# Altium PCB tomg.PcbDoc (part 2 of 2)
Units mm, origin at the board's own origin, x right, y up, seen from the top; angles counter-clockwise.
Board outline 105.3 x 86.65 mm, 2 copper layers (Top Layer, Bottom Layer); 102 components, 0 nets, 379 pads, 0 vias.
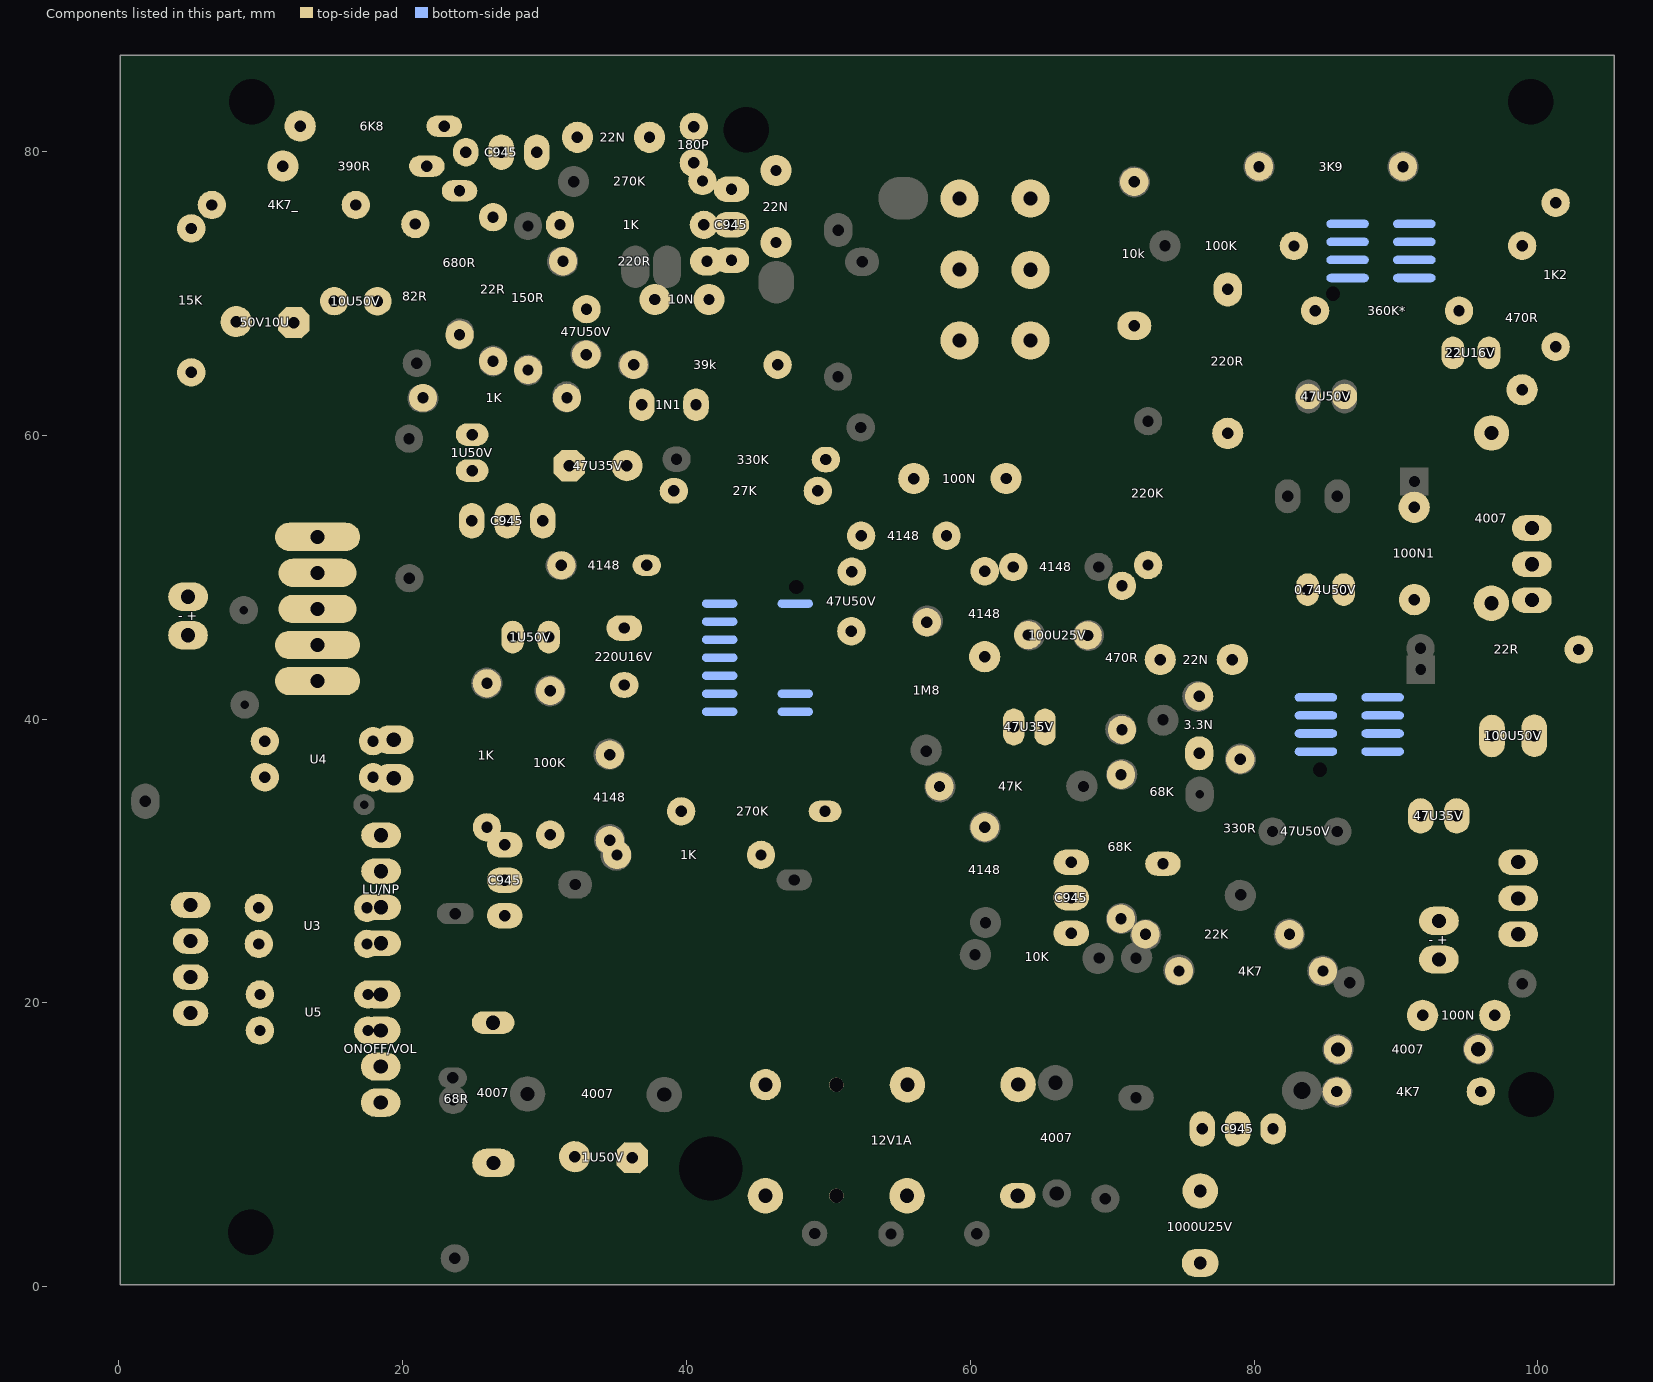
[diagram p2: the components of this part, seen from the top]

## Nets (pads, with @x,y where several pads share a name; then routed paths per layer and width w, separated by ;. In a path a pad name is that pad's centre, name@x,y a point inside that pad or via, vN(x,y) a via of type N, cw(c..) or ccw(c..) an arc to the next point about the centre after c; other vN are vias at no path point) (continued)
copper on no net: | length 5059.3
  Bottom Layer w0.25: 0,1.872 0,0 1.67,0 ; 0,85.929 0,86.846 0.932,86.846 ; 39.643,79.334 39.643,77.676 ; 40.003,78.538 40.003,77.542 39.777,77.542 39.643,77.676 ; 51.749,72.619 50.878,72.619 50.623,72.364 50.623,71.284 51.998,71.284 52.055,71.34 52.055,71.392 ; 104.082,86.846 105.479,86.846 105.479,85.554 ; 104.532,0 105.479,0 105.479,0.954 ; 39.643,77.676 40.782,76.537 ; 39.643,77.676 39.936,77.969 39.936,78.597 39.811,78.722 ; 39.643,77.676 39.643,78.555 39.811,78.722 ; 39.643,77.676 39.702,77.676 39.995,77.969 39.995,78.538 39.811,78.722 ; 40.782,76.537 43.076,76.537 40.782,76.537 ; 40.782,76.537 41.041,76.797 42.431,76.797 ; 41.309,76.797 42.431,76.797 ; 41.309,76.797 41.527,76.579 42.214,76.579 42.431,76.797 ; 41.309,76.797 42.18,76.797 42.431,76.797
  Bottom Layer w0.3: 57.241,48.848 57.76,48.329 ; 58.263,47.842 58.263,48.086 ; 82.756,13.542 80.356,13.542 79.966,13.152 80.21,13.396 82.983,13.396
  Bottom Layer w0.5: 12.582,82.478 14.002,83.897 15.056,83.897 13.564,83.897 11.804,82.137 11.804,81.367 12.38,80.791 12.882,80.791 13.053,80.961 15.469,83.378 15.51,83.378 ; 23.075,82.222 24.607,82.222 25.126,81.703 25.126,79.869 25.009,79.987 25.009,81.619 24.641,81.987 23.82,81.987 24.273,81.535 24.54,81.535 24.825,81.251 24.825,81.167 24.808,81.15 24.808,81.134 ; 25.019,8.516 25.436,8.099 ; 25.103,41.882 25.74,41.245 30.476,41.245 ; 25.63,19.208 25.241,18.819 25.647,18.819 ; 26.973,8.061 27.06,8.061 ; 26.977,45.564 25.347,43.934 25.347,43.171 25.111,42.936 25.111,44.136 27.488,46.512 27.488,46.529 ; 27.169,13.313 27.169,13.631 27.973,14.434 ; 27.252,13.166 27.301,13.166 28.161,14.026 28.161,14.577 28.096,14.513 28.096,14.334 ; 28.501,12.015 29.089,12.015 29.097,12.007 ; 28.502,25.854 28.544,25.896 ; 29.446,34.108 29.446,31.195 29.815,30.827 30.853,30.827 31.64,31.614 31.64,33.338 ; 29.557,19.229 25.051,19.229 24.909,19.086 24.909,18.429 25.298,18.04 29.231,18.04 30.156,18.965 ; 30.658,10.506 30.658,9.071 31.307,8.422 32.418,8.422 31.599,9.241 31.08,9.241 30.958,9.12 ; 32.937,38.525 35.054,38.525 35.378,38.2 35.378,37.657 ; 32.994,40.901 33.091,40.803 36.562,40.803 ; 32.996,38.495 32.803,38.495 32.042,37.734 32.042,37.491 32.435,37.097 32.46,37.097 33.256,37.893 ; 33.691,41.42 36.886,41.42 37.049,41.257 33.286,41.257 33.999,41.257 34.405,41.663 35.378,41.663 ; 33.963,42.523 34.51,43.07 35.629,43.07 36.201,43.07 37.101,42.17 37.101,41.259 ; 34.852,62.9 36.833,62.9 ; 35.576,29.708 35.532,29.664 35.532,29.258 34.547,29.258 34.077,29.727 33.709,29.727 34.458,28.978 35.817,28.978 35.906,29.067 35.906,30.528 ; 36.179,54.175 36.179,55.121 37.805,56.747 38.84,56.747 ; 37.125,52.149 37.125,52.384 39.983,55.242 39.983,56.08 ; 38.624,58.696 38.624,58.823 39.195,59.395 44.199,59.395 44.364,59.23 43.742,59.23 43.628,59.115 39.411,59.115 ; 38.764,56.747 40.027,56.747 40.053,56.721 40.053,55.324 39.348,54.619 ; 39.322,54.912 39.322,55.559 39.665,55.902 ; 39.38,57.775 41.126,57.775 41.196,57.845 ; 39.811,78.974 39.811,77.935 40.012,77.735 ; 40.355,79.945 41,79.945 42.691,78.254 43.051,78.254 ; 41.215,58.226 41.253,58.264 ; 44.621,30.079 46.534,28.165 47.095,28.165 ; 48.713,71.269 48.713,70.606 49.819,69.5 50.273,69.5 ; 49.942,74.912 49.942,75.759 50.703,76.521 ; 50.064,74.801 50.064,75.655 50.771,76.361 ; 50.359,73.794 49.935,74.218 49.935,74.807 49.935,76.374 50.703,77.141 51.133,77.141 ; 52.055,71.392 55.5,71.392 56.237,72.129 56.237,72.528 ; 58.641,66.252 58.877,66.488 ; 61.03,47.218 61.398,47.218 64.684,43.932 64.728,43.932 ; 63.86,46.981 64.044,46.981 64.036,46.972 64.036,46.876 63.755,47.156 63.755,46.99 65.069,45.676 65.148,45.676 65.148,46.394 ; 65.49,41.899 65.49,46.561 ; 67.103,35.472 67.103,33.728 68.282,32.548 67.595,33.236 67.595,34.268 67.423,34.44 ; 67.128,35.429 67.128,35.988 67.251,36.111 68.08,36.111 68.307,35.884 ; 67.505,46.403 67.505,46.42 67.803,46.718 68.82,46.718 68.925,46.823 68.925,46.42 68.942,46.403 68.942,42.775 68.995,42.723 68.995,46.298 68.697,46.596 68.697,43.143 69.135,42.705 69.135,41.041 67.277,42.898 67.277,46.841 67.575,47.139 68.925,47.139 69.573,46.49 69.573,41.724 ; 68.545,33.449 70.006,31.988 70.323,31.988 ; 68.577,33.052 68.577,35.288 68.626,35.337 68.626,33.74 68.565,33.679 68.565,34.882 68.688,34.76 ; 68.698,32.864 68.745,32.912 68.745,35.233 ; 69.31,41.987 69.31,46.333 ; 73.087,40.042 72.64,40.489 72.64,41.435 73.271,42.066 75.452,42.066 ; 76.747,60.434 79.044,62.732 79.265,62.732 ; 76.986,59.574 76.986,59.673 76.654,60.004 77.637,60.987 77.637,61.208 ; 78.024,60.815 76.611,60.815 76.317,60.52 76.317,59.869 76.857,59.329 78.749,59.329 79.83,60.41 79.83,60.778 79.265,61.343 ; 78.27,61.27 77.127,61.27 76.353,60.496 76.353,60.643 77.047,61.337 78.485,61.337 ; 78.319,12.856 78.344,12.856 78.896,13.409 ; 78.376,12.761 78.249,12.761 78.503,12.507 78.503,11.11 78.046,11.567 78.046,13.142 78.559,13.655 81.455,13.655 81.907,14.107 ; 79.189,11.516 79.468,11.795 79.468,12.634 79.849,13.015 79.849,13.446 79.986,13.31 83.374,13.31 ; 79.246,10.202 79.246,12.082 ; 79.468,12.1 79.468,12.354 80.332,13.218 82.805,13.218 82.983,13.396 ; 81.734,23.679 83.884,25.829 84.547,25.829 81.709,22.991 81.709,22.954 83.945,25.19 83.945,26.099 ; 82.238,60.963 83.368,60.963 84.449,62.044 84.449,62.572 84.449,62.486 83.405,61.442 ; 82.485,15.064 82.554,14.995 83.279,14.995 ; 83.253,14.891 83.236,14.874 82.131,14.874 80.991,13.735 80.646,13.735 82.303,15.392 83.563,15.392 84.616,14.339 84.616,13.718 ; 83.392,63.333 81.771,63.333 81.23,62.793 81.144,62.793 82.164,63.813 83.859,63.813 ; 86.525,63.702 88.355,63.702 89.264,62.793 88.675,63.383 87.127,63.383 87.188,63.321 ; 88.972,28.27 89.28,28.578 ; 89.211,7.33 89.646,7.33 ; 92.352,22.394 93.018,23.06 ; 93.024,25.778 93.024,25.896 ; 97.442,28.131 100.609,28.131 101.844,26.897 101.844,26.448 ; 97.757,29.918 99.317,29.918 99.505,30.106 ; 98.606,22.762 98.606,21.726 98.606,24.838 ; 98.606,27.366 98.613,27.372 ; 98.889,50.762 99.114,50.988 ; 99.097,35.276 99.097,35.476 ; 100.486,43.046 100.486,48.223 99.928,48.782 99.928,49.126 100.382,49.126 100.787,48.721 100.787,42.573 ; 101.807,54.464 99.104,54.464 99.018,54.378 98.638,54.378 98.945,54.378 98.994,54.427 98.994,54.071 98.404,53.481 98.404,54.415 98.92,54.931 102.925,54.931 ; 26.952,12.891 26.952,13.822 27.998,14.869 31.794,14.869 32.637,14.026 28.501,14.026 27.366,12.891 26.952,12.891
  Bottom Layer w0.6: 18.85,28.902 19.036,28.902 ; 30.294,45.781 31.709,44.366 37.59,44.366 39.668,46.444 39.668,48.514 46.507,55.354 ; 36.702,40.446 36.773,40.518 42.337,40.518 ; 41.788,43.058 41.788,44.355 ; 42.059,48.217 42.059,48.965 43.415,50.321 49.308,56.214 ; 42.337,41.788 43.879,41.788 44.332,41.335 44.332,32.083 43.48,31.231 43.48,28.667 44.95,27.197 52.512,27.197 57.697,32.382 61.014,32.382 ; 42.337,45.598 45.466,45.598 45.466,31.327 45.502,31.291 ; 43.181,46.861 43.836,46.861 44.358,47.384 44.358,49.195 45.566,50.402 49.467,54.304 51.007,54.304 51.482,54.779 52.657,54.779 ; 45.466,45.468 45.466,48.649 47.21,50.394 51.642,50.394 ; 46.7,40.513 46.7,32.101 48.597,30.204 51.184,30.204 53.857,32.877 53.857,34.254 ; 47.662,41.788 49.224,41.788 50.01,41.002 50.01,39.778 47.875,37.643 47.875,32.761 49.157,31.479 50.557,31.479 52.678,33.599 52.678,42.572 54.502,44.396 61.014,44.396 ; 47.662,48.138 52.71,48.138 ; 48.382,62.829 53.407,62.829 53.933,62.303 63.232,62.303 70.401,69.472 ; 51.642,50.619 52.302,51.279 52.302,52.915 ; 52.132,48.138 53.492,48.138 55.711,50.357 58.29,50.357 59.943,48.704 63.482,48.704 ; 52.457,54.779 53.713,54.779 55.576,52.915 58.322,52.915 ; 53.857,33.929 53.857,37.944 56.32,40.406 59.145,40.406 60.37,39.182 60.37,36.309 59.287,35.226 57.865,35.226 57.861,35.23 ; 63.057,48.704 64.415,48.704 65.457,49.746 65.457,51.858 63.06,54.255 61.89,54.255 60.634,55.511 60.634,58.194 61.519,59.078 64.078,59.078 68.729,63.729 ; 65.207,68.929 67.307,68.929 69.276,70.897 73.333,70.897 74.757,69.473 74.757,66.054 73.057,64.354 70.879,64.354 68.392,61.867 ; 68.654,63.729 70.681,65.756 72.449,65.756 73.648,66.955 73.648,68.439 72.62,69.466 70.401,69.466 ; 77.79,60.137 76.163,58.51 69.44,58.51 68.775,59.175 68.775,60.725 70.872,62.822 73.855,62.822 75.914,64.881 75.914,71.767 77.488,73.342 82.804,73.342 ; 78.464,44.193 81.027,41.629 81.027,38.159 84.017,35.169 84.017,30.962 84.688,30.291 86.741,30.291 87.68,31.23 87.68,34.717 86.857,35.539 86.857,37.454 ; 78.819,35.379 81.923,35.379 82.907,34.395 82.907,32.704 ; 82.907,33.554 82.907,30.343 84.058,29.193 87.448,29.193 88.832,30.578 88.832,37.729 ; 84.023,37.661 85.743,37.661 ; 84.097,41.506 85.636,41.506 ; 84.138,40.208 86.014,40.208 86.864,41.059 86.864,42.185 88.207,43.529 ; 84.207,48.917 84.207,56.896 85.463,58.152 88.052,58.152 91.279,54.925 ; 84.482,41.506 84.482,43.279 85.924,44.72 85.924,48.732 86.312,49.12 ; 85.743,37.668 85.743,33.682 85.743,32.621 86.287,32.077 ; 86.857,37.119 86.857,39.583 87.478,40.204 89.2,40.204 90.323,40.204 ; 87.857,43.178 89.838,45.159 91.56,45.159 91.727,44.992 ; 89.054,38.984 91.131,38.984 ; 89.2,41.474 90.645,41.474 91.107,41.012 ; 89.462,26.7 89.797,27.035 ; 89.982,28.329 89.982,34.815 91.142,35.975 91.142,41.012 ; 91.127,74.85 93.159,74.85 93.968,75.658
  Bottom Layer w0.7: 18.975,13.1 20.5,13.1 21.275,13.875 21.275,15.746 22.057,16.529 30.007,16.529 31.032,17.554 55.857,17.554 58.232,15.179 ; 26.394,18.869 56.567,18.869 61.507,13.929 ; 32.144,22.417 32.985,21.577 57.778,21.584 60.622,18.741 77.096,18.746 ; 33.557,23.823 34.452,22.929 58.174,22.929 60.811,20.291 ; 39.816,32.458 39.816,29.676 43.621,25.87 53.753,25.87 ; 69.691,74.893 86.585,74.893 ; 82.804,73.597 91.66,73.593 ; 83.907,68.254 83.907,71.396 84.833,72.322 86.964,72.322 ; 91.066,72.327 92.94,72.327
  Bottom Layer w0.8: 4.95,55.55 19.011,55.55 22.907,51.654 24.807,51.654 ; 5.05,21.82 6.27,21.82 8.25,23.8 8.25,25.146 9.882,26.779 9.882,26.454 ; 5.05,26.9 3.85,26.9 2.975,26.025 2.975,18.05 4.175,16.85 9.325,16.85 12.507,20.032 12.507,22.779 ; 5.4,24.405 6.48,24.405 7.2,25.125 7.2,29.25 7.2,36.125 9.52,38.445 10.29,38.445 ; 8.875,41.025 9.4,40.5 11.55,40.5 14.009,38.041 14.009,12.056 17.57,8.495 25.901,8.495 26.128,8.722 ; 9.865,24.155 12.47,24.155 12.475,24.15 ; 10.29,35.905 12.507,33.688 12.507,28.319 12.507,21.667 ; 13.65,45.075 9.025,45.075 5.775,41.825 5.775,33.525 1.825,29.575 1.825,15.3 11.975,5.15 44.303,5.15 45.561,6.408 ; 14.003,50.3 16.754,50.3 20.454,54 ; 14.003,52.84 8.815,52.84 7.075,51.1 7.075,45.15 4.25,42.325 4.25,33.825 0.725,30.3 0.725,3.525 2.875,1.375 13.4,1.375 15.9,3.875 45.925,3.875 48.75,6.7 48.75,11.725 46.24,14.235 45.571,14.235 ; 14.678,52.448 14.746,52.516 ; 17.275,33.975 17.275,35.27 17.91,35.905 19.555,35.905 19.2,35.905 ; 19.175,17.65 20.475,18.95 20.475,20.001 22.89,22.417 32.144,22.417 32.657,21.904 ; 19.3,21.05 22.073,23.823 33.557,23.823 ; 19.4,15.8 24.182,20.582 24.182,20.854 ; 19.719,49.269 19.735,49.269 ; 20.221,60.201 20.447,60.119 ; 20.468,41.575 20.468,49.933 ; 20.475,41.575 19.575,40.675 17.525,40.675 15.607,38.757 15.607,12.743 17.157,11.193 24.327,11.193 27.285,11.193 28.838,12.746 28.84,12.746 ; 21.181,66.151 21.181,67.847 21.269,67.935 24.086,67.935 24.057,67.906 24.057,66.549 23.994,66.612 23.581,66.612 ; 21.833,65.958 21.833,65.495 23.357,63.971 ; 22.419,56.249 22.419,56.302 22.446,56.275 24.158,56.275 ; 22.715,65.325 22.715,65.252 23.01,64.957 ; 23.008,56.929 24.837,56.929 24.96,57.052 25.04,56.972 ; 23.369,55.732 23.422,55.679 24.31,55.679 ; 23.757,51.654 28.045,51.654 30.208,53.816 31.3,53.816 ; 24.796,30.683 28.176,30.683 28.176,32.186 24.824,32.186 24.796,32.214 24.796,30.718 27.538,30.718 ; 25.226,31.184 28.034,31.184 28.09,31.24 28.09,31.584 28.148,31.642 25.542,31.642 25.484,31.7 25.484,31.012 25.312,30.84 ; 25.258,42.297 28.844,42.21 28.983,42.071 28.983,43.272 28.286,43.969 28.286,45.152 27.173,45.152 27.086,45.065 ; 25.258,43.237 27.086,45.065 ; 25.26,42.275 25.26,43.215 ; 26.369,18.442 28.202,18.442 ; 26.406,43.725 27.398,44.717 28.077,44.717 28.303,44.491 28.303,44.021 28.408,43.916 28.408,43.22 28.304,43.324 26.406,43.324 26.928,43.846 27.416,43.846 ; 27.452,12.242 28.78,13.57 ; 27.659,45.065 27.086,45.065 ; 28.802,13.586 30.258,13.93 30.854,13.334 30.854,9.532 31.529,9.685 29.439,11.775 ; 29.044,12.08 29.044,13.908 29.066,13.93 ; 29.093,62.006 29.117,61.982 29.959,61.982 ; 29.532,63.354 31.731,63.354 31.986,63.099 ; 29.69,11.67 29.69,12.208 ; 29.793,12.677 29.793,14.399 ; 29.968,11.434 30.534,10.868 30.534,13.658 29.793,14.399 ; 30.067,12.011 30.26,11.818 30.26,13.932 29.793,14.399 ; 30.086,54.386 30.128,54.428 33.557,54.428 ; 31.157,20.854 31.758,20.254 57.274,20.254 60.557,16.97 78.151,16.97 ; 31.397,60.096 32.123,60.822 32.123,62.628 ; 31.574,60.743 31.593,60.762 31.593,62.117 ; 31.584,9.476 31.648,9.54 31.648,13.242 30.491,14.399 29.793,14.399 ; 32.227,37.495 33.112,38.38 ; 33.844,53.679 33.844,59.187 ; 33.939,38.349 34.852,37.436 ; 34.61,34.128 35.352,34.128 ; 35.614,46.415 41.481,52.283 41.481,58.29 ; 35.647,8.952 35.805,9.11 35.805,15.004 37.054,16.254 ; 35.859,13.535 38.433,13.535 ; 35.88,14.129 38.282,14.129 ; 35.955,12.779 38.057,12.779 ; 36.861,16.161 53.407,16.161 55.228,14.339 55.897,14.339 ; 38.723,60.741 38.723,61.773 ; 38.747,61.797 38.747,63.985 ; 40.257,26.254 42.141,24.37 54.868,24.37 59.182,28.308 ; 45.251,30.427 47.329,28.349 ; 47.59,28.663 51.849,28.663 55.21,32.024 55.21,36.138 56.885,37.813 ; 48.778,70.826 48.778,81.423 ; 48.887,71.027 50.067,69.847 ; 49.764,33.5 49.764,37.238 51.382,38.856 51.382,45.958 51.534,46.111 57.497,46.111 ; 50.56,56.83 51.134,56.256 ; 53.753,25.87 57.793,29.91 59.355,29.91 59.359,29.906 ; 55.274,76.705 59.305,78.656 59.24,78.591 ; 55.518,72.215 57.257,73.954 61.432,73.954 64.207,71.179 ; 56.95,48.46 57.6,47.81 ; 57.313,16.098 58.952,14.459 58.952,3.48 ; 57.982,47.504 63.407,47.504 64.782,46.129 ; 58.684,29.91 62.486,29.91 62.49,29.906 63.2,30.616 63.2,32.394 63.2,39.43 ; 59.301,52.835 59.301,59.293 60.418,60.411 63.54,60.411 70.982,67.854 ; 60.478,23.266 62.728,23.266 62.821,23.359 62.821,25.918 62.913,26.01 60.262,26.01 59.723,25.471 59.723,23.837 60.755,22.804 ; 60.811,20.291 76.057,20.291 76.991,21.225 76.991,24.467 76.991,30.127 78.968,32.105 78.968,37.11 ; 61.034,7.368 61.233,7.368 61.271,7.406 66.554,7.406 65.979,7.981 65.233,7.981 65.137,7.885 61.673,7.885 ; 61.034,7.958 61.646,8.57 65.748,8.57 67.8,6.518 ; 61.034,69.723 61.828,68.929 65.907,68.929 ; 61.812,14.186 61.871,14.245 ; 62.724,38.91 62.724,37.958 ; 62.778,37.838 62.778,37.904 62.724,37.958 ; 63.2,34.67 63.2,35.374 ; 63.2,35.003 63.2,35.704 ; 63.2,37.482 62.724,37.958 ; 64.365,14.245 64.496,14.376 64.526,14.406 ; 65.582,84.023 92.752,84.023 ; 65.63,25.36 65.63,23.638 66.578,22.69 69.374,22.69 69.332,22.732 69.332,23.594 68.45,24.476 68.126,24.476 ; 66.318,23.508 66.318,23.53 66.038,23.81 66.038,24.584 67.438,23.184 68.256,23.184 68.212,23.228 66.814,23.228 ; 67.352,22.69 66.126,22.69 65.566,23.25 65.566,25.424 67.416,25.424 67.502,25.51 68.902,24.11 ; 67.764,27.89 67.85,27.976 ; 68.392,61.867 67.325,60.8 67.325,58.075 68.486,56.914 81.257,56.914 ; 69.341,36.845 69.672,36.514 71.176,36.514 ; 69.422,37.199 69.422,40.662 ; 69.443,40.663 69.649,40.869 ; 69.691,74.893 67.935,76.648 67.935,80.791 69.669,82.524 71.42,82.524 88.825,82.524 92.084,82.524 98.257,76.351 98.257,73.154 98.257,68.185 ; 69.851,36.718 69.851,36.769 ; 69.876,41.354 71.329,39.901 71.329,37.506 ; 69.953,37.124 69.953,39.493 70.208,39.238 70.691,39.238 70.742,39.187 70.742,37.608 ; 70.084,25.186 71.032,24.238 ; 71.032,22.82 71.032,24.238 ; 71.048,36.972 71.227,37.151 ; 71.484,23.702 71.334,23.852 71.334,25.38 71.398,25.316 71.718,25.316 72,25.034 72,23.744 ; 71.537,67.697 71.764,67.697 ; 71.678,13.322 71.678,12.54 73.214,11.004 76.216,11.004 76.334,11.122 ; 71.806,13.802 72.022,13.802 73.938,11.886 ; 71.828,22.474 71.828,22.562 72.71,23.444 72.71,25.402 72.668,25.444 ; 72.274,44.727 72.274,43.842 72.554,43.562 73.675,43.562 74.029,43.916 74.029,45.247 73.956,45.32 ; 72.302,13.026 73.442,11.886 76.304,11.886 ; 72.754,26.048 72.754,26.004 72.432,26.326 69.978,26.326 69.612,25.96 71.032,24.54 71.032,24.238 ; 72.918,41.293 74.042,40.169 ; 72.952,11.267 73.988,10.23 75.81,10.23 ; 73.184,11.37 73.27,11.37 73.334,11.434 75.786,11.434 ; 73.721,41.917 74.948,41.917 75.071,41.794 ; 74.088,10.23 76.09,10.23 76.132,10.272 76.196,10.272 ; 74.73,22.806 74.73,26.366 73.12,27.976 67.85,27.976 ; 75.238,26.133 73.395,27.976 67.85,27.976 ; 76.937,72.79 77.8,73.654 82.407,73.654 ; 77.096,72.829 82.482,72.829 ; 77.219,30.38 78.889,32.05 ; 77.732,66.929 85.725,66.929 86.957,68.161 89.899,68.161 91.619,69.88 91.619,70.903 ; 77.789,69.409 77.789,70.282 ; 77.876,19.526 78.936,20.586 78.936,26.572 78.936,21.834 ; 78.284,10.982 78.284,12.23 78.834,12.78 ; 78.834,11.122 78.834,12.78 ; 79.144,15.288 81.76,17.904 85.017,17.904 86.236,16.685 ; 79.246,11.822 79.246,11.886 79.285,11.925 79.285,13.231 ; 79.796,13.409 81.034,13.409 ; 80.816,11.19 80.83,11.176 80.83,9.132 ; 81.579,13.89 82.218,14.529 84.486,14.529 ; 81.832,11.256 81.886,11.202 81.886,9.118 ; 82.003,13.89 82.794,13.89 83.374,13.31 84.778,13.31 85.82,14.352 ; 82.114,14.426 82.23,14.542 85.38,14.542 ; 84.507,13.31 86.269,13.31 ; 84.857,41.506 84.857,43.129 86.357,44.629 86.357,46.479 ; 85.612,14.56 84.584,13.532 79.586,13.532 78.834,12.78 ; 86.134,78.823 88.339,81.029 91.157,81.029 93.968,78.218 93.968,75.658 ; 88.835,44.079 91.307,44.079 ; 89.125,73.718 89.025,73.818 89.025,77.468 90.49,78.933 ; 89.657,44.654 91.332,44.654 ; 89.701,26.042 89.701,27.6 90.628,28.527 ; 90.907,84.454 92.007,84.454 ; 91.13,48.937 91.615,49.422 92.136,49.422 92.324,49.234 92.324,49.086 ; 91.615,45.542 91.615,48.415 91.689,48.489 91.727,48.489 92.324,49.086 ; 92.324,33.767 92.545,33.988 92.545,48.095 ; 92.324,44.721 92.324,49.086 ; 92.324,44.931 92.421,44.834 92.421,44.283 92.359,44.221 ; 92.94,72.327 94.127,71.14 94.44,70.826 94.44,68.778 ; 93.719,71.636 95.435,73.352 98.885,73.352 ; 94.225,46.428 94.225,48.472 ; 94.351,72.229 97.107,72.229 ; 94.457,63.229 94.457,66.054 ; 94.507,71.179 95.182,71.854 95.182,72.479 ; 94.632,71.929 94.632,72.004 ; 94.905,72.704 96.282,72.704 ; 95.324,18.55 95.348,18.526 ; 95.774,16.914 96.154,17.294 96.224,17.294 96.626,17.696 96.359,17.696 95.791,18.264 97.008,18.264 97.764,17.508 97.502,17.508 ; 95.807,73.079 98.107,70.779 98.257,70.779 ; 96.296,19.046 97.196,18.146 ; 96.632,73.352 98.031,71.954 98.257,71.954 ; 97.124,17.674 97.716,17.082 97.478,17.082 97.277,17.283 97.277,16.783 ; 97.907,67.854 97.907,73.102 ; 98.524,27.448 98.606,27.366 98.646,27.326 ; 99.059,50.932 99.114,50.988 ; 99.317,29.918 99.347,29.888 ; 100.197,1.947 103.075,4.825 103.075,17.793 103.075,24.825 101.692,26.208 ; 100.574,27.326 101.692,26.208 ; 100.693,27.579 100.736,27.579 101.692,26.623 101.692,26.208 ; 101.789,31.446 101.789,31.342 100.825,30.378 101.633,30.378 101.867,30.144 ; 102.205,30.474 102.205,34.702
  Bottom Layer w0.9: 40.976,83.896 46.305,83.896 48.778,81.423
  Bottom Layer w1: 1.647,45.927 5.655,45.927 ; 4.836,48.621 4.836,61.261 8.996,65.421 8.996,67.987 ; 5.4,19.325 6.8,19.325 8.07,20.595 9.94,20.595 ; 11.689,52.448 15.619,52.448 ; 15.175,69.45 15.175,71.75 16.787,73.362 16.787,75.935 ; 16.259,75.333 16.259,76.959 ; 16.437,75.917 16.437,77.086 17.453,78.102 22.279,78.102 ; 16.587,75.345 16.587,77.236 18.494,79.143 20.831,79.143 ; 17.097,76.502 17.097,76.933 18.125,77.961 ; 17.123,76.07 18.24,76.07 18.291,76.121 ; 18.15,15.45 18.778,15.45 ; 18.475,24.2 20.225,24.2 22.319,26.294 23.702,26.294 ; 18.475,29.28 19.97,29.28 20.31,28.94 31.57,28.94 32.156,28.354 ; 18.601,69.425 18.601,61.606 20.446,59.76 ; 18.737,78.953 18.813,78.877 18.813,78.293 ; 18.998,31.714 19.234,31.95 ; 19.333,77.949 19.333,78.686 20.12,79.473 21.923,79.473 23.092,78.305 23.092,77.975 23.092,77.949 22.127,78.915 20.857,78.915 20.831,78.889 20.069,78.889 ; 19.375,38.545 22.18,38.545 23.425,37.3 32.169,37.3 32.82,36.649 35.081,36.649 35.131,36.7 35.131,37.69 ; 19.676,49.946 29.837,49.946 ; 19.859,77.469 23.161,77.469 ; 21.568,75.13 21.669,75.232 25.81,75.232 ; 21.669,66.216 22.151,66.216 22.762,65.605 22.508,65.605 ; 21.818,77.41 23.708,77.41 ; 22.076,64.691 22.381,64.691 24.514,62.557 24.514,60.144 ; 22.355,57.299 22.355,54.861 23.041,54.175 25.225,54.175 25.403,54.353 25.403,55.343 ; 22.489,77.969 23.857,77.137 ; 23.157,57.693 24.554,57.693 ; 23.209,1.947 100.197,1.947 ; 23.295,81.836 24.692,80.439 24.692,80.261 ; 23.357,67.249 23.357,63.971 25.016,62.312 ; 23.549,77.746 25.657,77.746 26.622,78.711 26.622,79.448 ; 23.701,57.706 25.098,57.706 ; 23.955,63.903 23.955,67.053 24.184,66.824 24.184,63.37 ; 24.047,77.327 25.963,77.327 26.971,78.335 26.971,79.001 ; 24.057,67.906 24.336,67.627 24.336,63.649 ; 24.182,20.854 31.157,20.854 ; 24.528,2.27 24.528,2.524 ; 24.895,60.042 24.895,63.09 24.336,63.649 ; 24.938,31.154 24.938,32.932 24.971,32.966 27.396,32.966 28.176,32.186 ; 25.312,30.84 27.341,30.84 ; 25.403,41.907 29.035,41.907 29.188,42.059 29.188,43.137 27.173,45.152 ; 25.429,60.144 25.429,62.557 24.336,63.649 ; 26.394,18.869 27.765,18.869 ; 26.601,18.442 29.116,18.442 29.543,18.869 ; 26.622,65.427 26.622,66.875 28.273,68.526 28.273,73.631 29.061,74.419 29.34,74.419 ; 26.927,43.634 27.308,43.634 27.994,44.32 27.994,43.786 27.765,43.558 ; 26.989,25.737 40.585,25.737 ; 27.119,26.375 27.386,26.108 36.174,26.108 37,26.934 ; 27.308,42.948 26.063,42.948 25.325,42.21 28.844,42.21 ; 27.551,58.18 27.551,62.775 28.553,63.776 ; 28.705,64.767 29.493,64.767 31.321,62.938 30.204,62.938 29.086,64.056 ; 28.781,75.079 33.125,75.079 ; 29.086,74.444 32.845,74.444 33.724,73.565 33.724,69.768 ; 29.188,59.433 30.001,59.433 ; 29.209,12.036 31.601,9.645 31.601,9.039 ; 29.862,34.744 29.862,31.76 30.396,31.226 30.396,31.332 32.652,33.589 ; 29.96,52.96 30.486,52.96 ; 30.046,52.874 33.326,52.874 ; 30.074,53.422 30.274,53.622 32.894,53.622 ; 30.599,28.255 30.954,27.899 31.97,27.899 ; 30.599,50.708 29.837,49.946 ; 30.711,66.363 31.721,66.363 ; 30.759,65.881 31.301,65.339 31.995,65.339 ; 30.839,62.862 29.442,62.862 30.458,61.846 31.372,61.846 ; 30.966,8.572 30.966,8.978 31.651,9.664 ; 31.22,57.909 28.451,57.909 27.943,57.401 31.677,57.401 ; 31.499,65.935 31.525,65.935 34.674,62.786 ; 31.818,51.216 32.097,50.937 32.097,50.149 31.894,49.946 29.837,49.946 ; 31.956,13.713 29.086,13.713 28.553,14.246 32.134,14.246 32.439,13.941 32.439,9.014 ; 32.006,66.329 34.484,66.329 35.754,67.599 ; 32.083,8.42 32.083,9.563 ; 33.264,64.393 33.264,64.61 ; 33.404,37.182 33.988,37.182 ; 33.59,70.617 32.261,69.288 32.261,68.399 32.49,68.17 33.455,68.17 33.836,68.551 33.836,69.694 ; 33.658,38.021 34.09,37.589 ; 33.844,54.105 34.735,53.214 34.735,51.33 ; 33.844,59.187 36.452,61.795 36.478,61.795 ; 34.735,52.07 34.735,53.938 ; 34.815,49.794 34.735,49.874 34.735,53.938 ; 35.258,29.867 35.208,29.816 33.963,29.816 33.734,30.045 33.734,32.128 ; 35.258,30.351 35.425,30.185 ; 35.614,46.415 36.013,46.415 ; 35.782,58.071 36.054,58.071 38.723,60.741 ; 36.249,80.235 36.249,81.099 37.163,82.013 38.357,82.013 38.357,79.99 37.735,79.367 ; 36.427,54.505 38.052,56.131 38.51,56.131 ; 36.478,68.577 36.478,71.445 ; 36.579,72.412 37.976,72.412 ; 36.782,34.693 36.782,31.747 37.868,30.661 ; 37.087,75.994 37.087,78.998 37.363,79.274 37.363,75.511 37.555,75.319 37.555,81.005 ; 37.646,75.917 38.357,75.206 43.082,75.206 ; 37.762,53.932 37.697,53.997 39.145,55.445 39.145,55.75 ; 38.249,69.683 38.637,70.07 38.628,71.877 ; 40.251,62.341 40.251,61.706 40.911,61.046 42.892,61.046 44.035,62.189 43.146,62.189 42.588,61.63 41.8,61.63 41.419,62.011 ; 40.516,81.734 40.516,83.436 40.976,83.896 ; 40.606,62.621 43.197,62.621 43.654,63.078 ; 41.177,72.768 41.202,72.793 43.234,72.793 ; 41.481,71.853 41.558,71.777 43.132,71.777 ; 41.481,78.559 40.719,78.559 40.567,78.407 40.567,77.416 40.796,77.187 42.243,77.187 ; 42.218,57.02 43.31,58.112 ; 42.269,62.024 46.104,65.859 46.231,65.859 ; 42.675,77.467 41.532,78.61 45.952,78.61 ; 43.539,62.582 43.539,63.319 46.511,66.291 52.073,66.291 53.988,64.377 61.933,64.377 64.24,66.684 ; 43.87,67.18 44.653,67.964 53.772,67.964 55.078,66.659 59.494,66.659 ; 45.114,30.172 46.622,28.663 47.185,28.663 ; 45.622,70.431 45.622,74.673 45.647,74.698 47.12,74.698 47.273,74.546 47.273,72.285 ; 45.799,71.295 45.799,73.073 ; 46.663,64.564 47.984,65.884 47.984,66.164 ; 46.815,71.599 46.815,69.948 46.536,69.669 45.418,69.669 45.444,69.694 46.841,69.694 47.233,70.087 47.233,71.842 ; 48.247,60.703 50.397,60.703 51.083,61.389 52.937,61.389 53.115,61.211 53.115,60.017 53.038,59.941 51.768,59.941 51.083,60.627 ; 48.924,63.294 51.565,63.294 51.616,63.344 51.616,64.284 51.235,64.665 49.736,64.665 ; 48.985,85.535 50.893,83.627 ; 49.042,63.971 49.736,64.665 ; 49.305,63.548 50.473,63.548 ; 49.308,56.214 49.308,58.453 ; 49.77,58.078 49.828,58.078 51.148,56.758 ; 50.117,64.665 49.736,64.665 ; 50.321,84.934 91.265,84.934 ; 50.676,57.934 51.54,57.071 57.001,57.071 ; 50.893,74.559 50.893,83.131 63.071,83.131 ; 51.274,57.515 56.862,57.515 ; 51.387,56.74 51.133,56.486 57.102,56.486 ; 54.435,78.305 54.435,76.515 59.24,76.515 ; 56.024,46.111 57.497,46.111 58.437,47.051 ; 56.036,47.241 61.979,47.241 62.301,46.919 64.799,44.421 ; 56.518,78.399 56.518,76.806 57.737,78.026 ; 56.874,79.067 57.026,79.219 57.026,76.032 56.956,75.962 56.956,75.897 ; 56.95,48.46 56.95,48.512 ; 57.701,70.139 57.701,72.019 58.158,72.476 60.52,72.476 61.104,71.892 61.104,70.292 61.003,70.19 ; 57.788,47.952 57.915,47.952 ; 57.864,76.503 57.864,78.915 ; 57.904,53.147 58.209,53.147 ; 58.729,67.195 59.24,66.684 ; 59.461,83.845 61.335,83.845 63.255,81.925 ; 60.114,70.52 59.987,70.393 58.005,70.393 58.971,71.358 60.088,71.358 61.003,70.444 ; 60.379,23.18 60.487,23.18 60.912,22.755 62.665,22.755 63.046,23.136 63.046,25.693 62.821,25.918 ; 61.014,23.492 62.64,23.492 62.665,23.517 ; 61.158,14.425 67.746,14.425 68.609,15.288 79.99,15.288 82.022,17.32 84.814,17.32 85.449,16.685 85.474,16.685 ; 61.649,5.915 88.979,5.915 89.695,6.631 89.695,16.655 ; 61.751,6.169 88.172,6.169 88.934,6.931 ; 62.523,56.957 64.21,55.27 75.185,55.27 78.718,51.737 82.553,51.737 83.976,50.314 83.976,48.917 ; 62.749,47.241 64.07,45.92 ; 62.894,34.109 62.894,38.071 ; 63.136,72.247 63.136,71.104 63.771,70.469 65.981,70.469 68.279,72.768 74.628,72.768 74.832,72.971 74.832,73.606 74.578,73.86 68.177,73.86 ; 63.339,71.79 65.946,71.79 66.175,71.562 ; 64.322,45.92 64.322,46.117 66.837,48.632 66.837,55.165 ; 65.137,82.133 65.137,82.157 66.825,83.845 ; 66.805,24.355 67.669,23.492 68.304,23.492 ; 66.958,27.124 68.202,27.124 68.761,27.683 68.355,27.683 ; 67.102,39.824 67.102,38.8 65.764,37.462 67.313,39.011 67.313,39.697 ; 67.982,45.774 67.982,42.559 69.701,40.84 69.701,39.189 ; 69.294,40.916 69.294,36.982 70.564,35.712 70.564,35.379 ; 69.65,25.998 69.65,25.727 71.225,24.152 71.225,23.441 ; 70.082,37.386 70.082,35.862 70.564,35.379 ; 70.387,37.081 70.904,37.081 71.329,37.506 71.329,36.017 70.691,35.379 70.564,35.379 ; 70.742,26.326 72.476,26.326 72.582,26.22 72.582,22.854 ; 71.428,26.21 71.86,26.21 72.368,25.702 72.368,25.117 72.342,25.092 72.342,24.838 ; 71.554,77.858 72.519,78.823 86.134,78.823 ; 71.828,22.562 72.2,22.562 ; 72.19,29.842 74.222,29.842 76.175,31.795 ; 73.042,44.352 73.042,44.406 73.956,45.32 73.956,48.448 ; 73.372,31.684 73.917,32.228 73.917,39.494 ; 73.409,39.062 74.12,39.062 76.076,41.018 76.991,41.932 80.473,41.932 ; 73.881,41.674 74.906,41.674 75.593,42.362 76.965,43.734 ; 75.238,22.781 75.238,26.133 ; 75.975,41.399 75.975,43.863 77.118,45.006 78.261,45.006 ; 76.965,43.736 78.339,42.362 78.365,42.362 ; 77.067,6.55 88.914,6.55 ; 77.096,18.746 79.208,20.858 79.208,28.275 ; 77.6,60.423 77.6,60.627 78.845,61.871 78.845,61.312 78.057,60.525 ; 78.591,61.135 78.591,61.947 79.251,62.608 ; 78.616,20.266 78.616,29.08 80.978,31.442 ; 78.666,68.389 78.805,68.25 ; 78.819,34.896 78.819,35.379 ; 78.972,27.124 78.972,28.165 ; 79.048,27.632 78.936,29.069 81.753,31.886 ; 79.832,65.354 89.307,65.354 91.875,62.786 98.606,62.786 ; 80.189,56.639 80.373,56.455 ; 80.293,55.47 81.949,55.47 82.124,55.645 81.183,55.645 ; 81.464,57.042 82.401,56.105 82.401,55.648 ; 81.512,61.541 82.477,62.506 83.518,62.506 82.096,61.084 82.096,56.283 ; 82.35,13.408 82.782,12.976 ; 82.61,51.248 84.089,49.769 ; 82.68,54.658 82.883,54.861 82.883,55.699 82.883,61.795 83.823,62.735 83.823,61.897 83.62,61.693 ; 82.889,62.506 83.064,62.681 ; 83.341,62.684 83.341,63.141 ; 84.28,17.802 86.795,17.802 87.1,17.497 87.1,16.405 86.9,16.605 ; 84.509,6.956 87.252,6.956 88.776,8.48 ; 85.093,14.475 86.541,14.475 86.719,14.297 86.719,13.179 86.516,12.976 82.782,12.976 ; 85.677,55.216 85.906,54.988 85.906,46.961 ; 85.804,12.976 82.782,12.976 ; 85.881,56.283 86.592,55.572 86.592,54.861 ; 85.957,62.684 85.957,61.795 86.465,61.287 88.954,61.287 ; 86.135,56.486 86.998,55.623 86.998,47.021 ; 86.414,62.049 88.192,62.049 88.954,61.287 ; 86.846,10.766 89.665,13.586 89.665,14.754 ; 87.328,62.1 88.446,62.1 90.834,59.712 96.599,59.712 ; 89.646,8.396 89.646,8.564 ; 90.834,55.039 92.997,55.039 94.188,53.848 ; 90.859,55.75 93.78,55.75 94.72,54.81 94.72,51.711 ; 91.037,60.881 97.082,60.881 97.26,60.703 97.26,59.433 90.808,59.433 88.954,61.287 ; 91.203,50.327 91.203,45.857 91.381,45.679 ; 91.24,45.209 91.24,48.358 90.3,49.298 90.3,50.543 90.63,50.873 92.027,50.873 92.18,50.721 92.18,48.46 ; 91.596,5.128 91.596,22.755 92.002,23.162 92.281,23.162 ; 91.621,54.81 91.85,54.81 93.729,52.93 92.815,52.93 91.316,54.429 90.884,54.429 92.98,52.334 94.237,52.334 ; 91.824,48.816 91.824,50.213 ; 92.12,25.264 92.12,26.659 92.221,26.76 93.242,26.76 ; 92.392,17.577 92.392,19.561 ; 92.392,20.577 93.744,21.929 93.744,22.901 93.814,22.971 ; 92.748,21.535 92.748,21.558 93.235,22.045 93.235,22.276 ; 92.912,26.193 96.934,30.215 ; 93.024,25.778 94.647,25.778 95.65,24.775 95.65,21.486 93.775,19.611 93.775,14.472 94.492,13.755 95.976,13.755 ; 93.221,55.318 94.364,54.175 94.364,53.946 ; 93.653,30.045 94.974,31.366 94.974,36.293 ; 93.774,25.652 93.885,25.764 93.885,27.166 ; 93.78,25.371 93.78,26.286 ; 93.992,62.984 93.609,63.367 93.609,65.822 94.195,66.409 ; 94.009,26.819 97.438,30.248 98.521,30.248 ; 95.819,16.762 102.863,16.762 102.9,16.725 ; 96.078,29.359 96.078,29.448 98.758,32.128 ; 96.23,29.511 98.199,29.511 98.606,29.918 ; 96.422,66.342 96.422,66.748 98.377,68.704 ; 97.39,67.317 99.126,69.053 ; 97.645,30.215 98.521,31.091 ; 97.768,21.282 97.768,22.933 ; 97.946,63.217 100.028,61.135 ; 98.406,67.249 99.126,67.969 99.126,69.703 ; 98.606,66.977 98.606,72.641 ; 99.126,69.983 99.126,69.281 101.158,67.249 100.485,67.249 ; 99.126,71.205 99.126,70.283 101.456,67.953 ; 99.176,66.697 99.176,67.043 ; 99.266,38.343 99.698,38.775 ; 99.317,25.194 99.673,24.838 ; 99.622,73.276 99.622,70.253 101.933,67.942 101.933,65.905 101.944,65.895 100.614,65.895 ; 99.698,32.737 100.867,33.906 101.984,33.906 ; 99.901,32.229 100.308,32.229 ; 100.121,31.422 100.136,31.436 ; 100.206,53.972 101.603,53.972 102.67,55.039 ; 100.3,66.396 100.3,67.064 ; 102.633,44.892 102.935,45.193 102.935,53.962 102.862,54.036 ; 102.633,45.12 102.633,44.053 103.014,43.672 103.548,43.672 103.903,44.028 103.903,74.559 101.389,77.073 100.066,77.073 100.003,77.137 100.003,76.349 103.102,73.25 ; 103.051,45.361 103.051,52.143 ; 33.734,32.128 34.376,32.128 34.63,31.874 34.827,31.874 34.573,32.128 33.734,32.128 ; 34.735,53.938 34.002,54.671 34.735,53.938
  Bottom Layer w1.2: 1.47,34.325 1.47,80.994 1.556,81.081 ; 2.95,76.475 2.95,66.209 4.961,64.198 ; 2.95,76.671 4.942,78.663 7.998,78.663 9.959,76.702 12.898,76.702 17.854,81.658 22.48,81.658 24.208,79.93 ; 11.748,78.854 10.176,80.425 2.212,80.425 1.556,81.081 ; 12.689,81.72 14.532,83.563 19.836,83.563 ; 16.787,75.935 18.262,77.41 20.312,77.41 ; 18.475,31.82 19.195,31.82 22.103,34.728 31.588,34.728 32.404,33.912 ; 18.787,75.885 20.428,77.525 21.676,77.525 ; 18.789,28.968 18.825,29.004 ; 18.799,83.588 29.914,83.588 32.501,81.001 32.501,80.965 ; 21.43,62.124 22.632,60.922 22.632,55.779 ; 21.833,74.854 24.881,74.854 24.97,74.765 25.823,74.765 27.133,76.075 29.453,78.395 29.453,79.847 ; 21.833,65.725 23.357,67.249 23.201,67.405 22.121,67.405 21.833,67.117 ; 22.571,55.451 23.18,54.842 25.192,54.842 25.184,54.834 23.141,54.834 ; 23.323,66.355 23.765,66.797 23.797,66.797 ; 23.424,44.032 23.424,44.784 ; 23.454,44.814 23.424,44.784 ; 24.971,60.754 25.016,60.799 25.016,62.312 ; 26.368,65.224 26.208,66.974 27.927,69.042 27.931,73.853 ; 26.971,79.001 26.991,79.021 ; 26.978,28.354 32.156,28.354 32.188,28.322 ; 27.54,55.02 27.54,58.934 ; 27.551,58.18 29.508,60.137 29.873,60.137 ; 27.551,59.943 28.083,60.475 28.083,61.823 28.967,62.707 28.967,63.507 29.093,63.381 29.093,60.221 29.177,60.137 30.063,60.137 30.273,60.347 30.273,61.655 ; 27.929,73.843 27.931,73.853 ; 27.963,60.041 27.963,60.355 27.999,60.391 27.999,62.614 ; 27.994,58.62 31.493,58.62 32.007,59.135 32.007,61.592 ; 27.999,62.371 28.604,62.975 28.604,64.285 ; 28.556,25.908 40.558,25.908 37.868,28.598 ; 28.988,34.744 29.862,34.744 ; 29.453,79.949 29.569,78.559 ; 30.248,32.822 30.248,34.744 ; 30.647,75.031 30.484,74.868 30.401,74.785 29.439,74.785 27.931,73.853 ; 30.759,66.135 30.229,66.666 30.229,71.041 31.525,72.336 ; 30.977,59.629 30.977,61.593 ; 30.992,74.868 30.992,74.736 31.125,74.868 33.336,74.868 34.217,73.987 34.217,70.261 33.724,69.768 ; 31.052,32.634 31.052,33.816 31.596,33.272 31.596,32.704 ; 31.928,33.912 33.188,33.912 ; 31.993,65.881 33.264,64.61 ; 32.33,33.585 32.657,33.912 33.798,33.912 ; 32.757,77.956 34.507,77.956 36.376,79.825 ; 32.931,65.685 33.352,65.264 ; 33.337,77.965 34.499,77.967 37.637,74.829 42.661,74.829 ; 33.562,25.908 35.786,25.908 37.868,27.99 37.868,30.661 ; 33.779,77.967 35.599,77.967 ; 33.844,54.105 33.844,52.961 34.735,52.07 34.735,48.835 34.093,48.194 30.525,48.194 26.834,48.194 23.424,44.784 ; 33.856,65.432 33.856,65.797 ; 34.323,60.683 34.323,62.343 ; 34.667,62.233 34.687,62.233 34.747,62.173 35.395,62.173 ; 34.818,33.912 32.404,33.912 ; 35.01,42.268 35.106,42.364 35.144,42.402 36.246,42.402 36.738,41.91 36.738,39.202 ; 35.014,33.912 35.036,33.912 ; 35.14,33.912 36.738,35.51 ; 35.576,42.364 35.614,42.402 34.346,42.402 32.018,40.074 32.018,40.038 31.275,39.295 25.141,39.295 23.424,41.012 23.424,44.784 ; 35.614,46.415 35.945,46.415 ; 35.754,67.599 37.838,69.683 38.249,69.683 38.355,69.789 38.129,69.789 37.947,69.607 ; 36.212,76.283 36.212,78.579 36.243,78.611 ; 36.212,78.033 36.212,79.661 37.555,81.005 ; 36.456,33.912 32.404,33.912 ; 36.738,33.948 36.738,39.958 ; 36.751,65.119 36.571,64.673 41.687,69.789 45.18,69.789 47.233,71.842 47.233,73.345 ; 37.152,54.468 38.763,56.079 39.109,56.079 ; 37.266,26.348 37.74,26.822 38.814,26.822 ; 38.747,63.985 41.363,66.601 41.943,67.18 43.87,67.18 ; 38.764,55.734 39.109,56.079 ; 39.094,56.094 39.109,56.079 ; 41.267,78.449 41.822,77.894 44.75,77.894 ; 41.441,72.33 43.169,72.33 ; 42.177,57.553 42.432,57.553 41.67,58.315 39.297,58.315 ; 42.72,77.271 42.661,77.329 42.666,77.325 45.581,77.325 47.233,78.977 ; 42.736,58.112 39.297,58.315 ; 44.199,62.481 46.225,64.507 45.956,64.507 46.171,64.723 46.171,65.429 47.051,66.309 ; 46.262,55.418 46.262,58.718 48.247,60.703 51.489,60.703 ; 49.042,63.971 43.386,58.315 39.297,58.315 ; 49.875,63.971 50.15,63.695 ; 50.067,69.847 60.405,69.847 61.003,70.444 ; 50.676,84.023 66.732,84.023 ; 52.378,72.217 54.416,72.217 54.418,72.215 55.518,72.215 ; 59.182,28.308 64.104,28.308 64.125,28.287 65.756,29.918 67.11,29.918 ; 59.301,52.835 61.068,51.068 61.264,51.068 61.34,51.144 ; 59.381,66.546 59.494,66.659 59.445,66.61 ; 59.632,53.094 61.404,51.322 63.474,51.322 63.58,51.216 ; 59.667,83.845 62.425,83.845 64.245,82.025 ; 60.65,3.907 90.515,3.907 ; 61.106,44.304 61.014,44.396 62.848,42.562 62.848,39.903 62.902,39.849 ; 61.846,6.408 61.956,6.518 71.548,6.518 ; 64.07,45.92 64.322,45.92 65.038,45.204 65.038,43.506 65.074,43.47 65.074,39.756 ; 64.245,82.069 66.021,83.845 ; 64.507,28.669 65.074,29.236 ; 65.074,29.842 65.074,41.532 ; 65.074,33.224 65.074,31.954 67.11,29.918 ; 65.074,38.27 66.628,39.824 67.102,39.824 65.074,41.852 65.074,43.194 ; 65.074,39.776 65.074,42.128 ; 65.176,70.563 67.096,72.483 67.958,73.345 72.659,73.341 ; 65.592,39.642 65.592,39.716 65.78,39.904 65.78,40.21 ; 67.11,24.918 69.091,23.162 ; 67.934,45.822 67.982,45.774 ; 67.974,35.252 67.974,33.372 69.548,31.798 73.205,31.798 73.205,41.246 ; 68.27,45.895 68.231,45.856 68.231,42.836 69.838,41.229 69.838,39.907 ; 70.869,6.55 77.067,6.55 78.305,7.788 85.558,7.788 ; 72.472,29.918 67.11,29.918 ; 72.525,61 74.603,61 77.632,64.03 77.632,69.754 ; 72.526,50.855 73.892,49.489 73.892,45.54 72.952,44.6 ; 72.678,44.486 72.488,44.676 72.488,46.387 73.409,47.308 73.409,46.159 ; 74.133,40.022 76.475,42.364 ; 74.289,40.958 74.289,41.012 75.071,41.794 ; 74.629,54.936 78.321,51.244 82.614,51.244 83.887,49.971 82.61,51.248 82.432,51.248 ; 76.175,32 76.175,37.284 ; 76.965,42.313 76.965,44.157 ; 77.534,44.215 79.386,42.364 ; 77.93,59.966 78.769,59.966 79.47,60.667 79.47,64.887 79.47,63.681 ; 78.223,67.983 78.538,67.983 ; 78.298,17.156 81.564,20.422 ; 78.464,7.109 88.99,7.109 89.211,7.33 ; 78.519,69.12 78.519,69.551 ; 79.782,7.788 81.354,9.36 ; 80.05,56.778 81.183,55.645 ; 80.373,56.455 80.883,56.455 81.258,56.08 ; 81.334,11.122 81.354,11.102 81.354,9.36 ; 81.464,57.042 81.464,62.611 81.613,62.76 83.15,62.76 ; 81.464,59.385 81.464,60.537 ; 81.518,8.482 81.518,7.82 81.55,7.788 ; 81.564,22.696 81.564,20.422 ; 81.835,10.951 81.923,10.951 82.66,10.96 86.926,10.96 ; 82.172,10.216 82.316,10.072 86.87,10.072 88.474,11.676 88.874,11.676 88.702,11.504 88.702,9.93 87.012,8.24 84.892,8.24 84.12,9.012 82.172,9.012 82.23,9.07 87.5,9.07 87.844,9.414 87.844,10.044 ; 82.335,25.347 82.477,25.347 83.212,26.082 87.64,26.082 89.462,24.26 89.462,23.14 ; 82.63,8.21 83.017,8.597 84.535,8.597 ; 83.656,26.55 88.344,26.55 88.838,26.056 ; 84.12,27.63 84.154,27.664 ; 84.412,27.332 84.49,27.254 87.978,27.254 ; 84.504,23.422 84.268,23.186 84.268,20.452 84.398,20.322 85.042,20.322 ; 84.764,7.788 82.926,7.788 81.354,9.36 ; 84.938,23.378 86.484,23.378 87.022,22.84 87.022,20.496 86.848,20.322 84.762,20.322 84.875,20.435 84.875,23.315 85.383,23.315 86.43,22.268 ; 85.004,27.812 85.31,27.812 ; 85.236,7.788 89.5,7.788 89.5,11.662 89.462,11.7 89.462,25.684 ; 85.322,21.076 85.386,21.076 85.838,21.528 85.838,22.41 ; 85.576,55.953 86.389,55.14 86.389,51.737 86.389,47.165 ; 86.846,62.76 88.852,62.76 91.418,60.195 96.293,60.195 ; 87.754,8.056 89.11,9.412 ; 88.541,26.843 89.714,28.016 89.738,28.016 ; 90.662,4.122 92.392,5.852 92.392,21.418 ; 91.702,28.94 92.388,28.94 ; 92.392,22.434 93.018,23.06 ; 93.208,52.334 94.555,50.988 96.338,50.988 ; 93.221,84.071 100.528,76.765 100.693,76.93 103.621,74.001 103.621,68.459 ; 93.714,30.266 92.388,28.94 ; 94.188,50.934 94.188,53.848 ; 94.188,52.126 95.326,50.988 ; 94.225,32.346 94.225,30.777 92.388,28.94 ; 94.225,33.23 94.225,38.566 94.225,44.434 ; 94.225,37.138 94.225,38.738 ; 94.225,43.464 94.225,47.106 ; 94.225,43.754 94.225,42.19 96.567,39.848 ; 94.225,46.636 94.225,49.622 ; 94.237,49.441 94.237,52.334 ; 94.712,35.851 96.693,37.832 ; 94.833,36.98 94.833,40.478 95.589,39.722 95.589,37.768 ; 94.88,50.988 94.906,50.988 ; 95.152,82.217 91.608,85.76 33.772,85.76 6.236,85.76 5.613,85.138 1.556,81.081 ; 97.062,65.895 100.614,65.895 101.798,67.079 ; 97.39,66.233 98.406,67.249 101.158,67.249 ; 97.439,43.094 97.439,43.72 97.831,44.112 97.831,47.808 98.455,47.184 98.455,42.208 98.533,42.13 99.133,42.13 98.793,42.47 98.793,47.912 ; 97.926,24.854 97.926,21.73 98.298,21.358 ; 98.034,66.275 98.436,66.677 100.046,66.677 99.786,66.937 99.786,67.931 ; 98.497,29.918 98.521,29.942 ; 98.606,24.838 98.606,21.726 98.9,21.432 98.9,21.358 ; 98.903,63.423 99.126,63.2 ; 99.114,53.54 99.226,53.54 99.272,53.586 ; 99.126,67.249 99.126,72.625 ; 99.13,24.796 99.128,24.796 99.244,24.68 99.244,21.73 ; 99.39,36.085 99.39,38.174 ; 99.39,37.119 99.39,40.795 ; 99.635,30.106 99.635,30.25 101.997,32.612 ; 99.825,38.25 99.825,48.46 99.737,48.548 97.541,48.548 96.767,47.774 96.767,46.386 96.767,43.418 99.825,40.36 99.825,40.308 ; 99.825,44.8 99.825,43.464 101.997,41.292 101.997,34.39 ; 99.939,31.546 99.825,31.432 99.825,31.126 101.007,32.308 ; 100.701,42.206 101.007,41.9 101.007,34.086 ; 101.558,53.586 103.478,51.666 ; 102.645,53.515 102.645,56.273 103.61,57.238 103.61,58.792 ; 102.874,54.316 103.016,54.458 ; 102.908,52.696 102.908,53.016 103.068,53.176 ; 103.381,44.904 103.381,45.118 103.621,45.358 103.621,49.961 103.621,60.749 103.621,69.123 ; 81.564,20.422 81.564,25.264 84.154,27.854 84.154,27.812 88.35,27.812 89.478,28.94 92.388,28.94
  Bottom Layer w1.5: 3.325,26.3 3.325,26.375 3.85,26.9 5.05,26.9 ; 5.05,19.28 6.52,19.28 6.565,19.325 6.8,19.325 ; 5.05,21.82 6.27,21.82 7.26,22.81 ; 5.05,24.36 6.01,24.36 6.9,25.25 ; 6.785,75.978 12.332,70.432 12.332,67.94 ; 7.825,36.9 7.825,36.915 9.355,38.445 10.29,38.445 ; 8.07,20.595 9.94,20.595 ; 8.8,47.675 13.918,47.675 14.003,47.76 ; 8.875,41.025 9.35,41.025 9.75,40.625 ; 9.079,25.975 9.799,26.695 9.865,26.695 ; 9.65,17.325 11.187,18.863 ; 9.865,24.155 11.85,24.155 ; 9.94,18.055 10.53,18.205 ; 10.29,35.905 12.507,33.688 ; 14.003,42.68 20,42.68 ; 28.084,43.037 29.062,42.059 29.188,42.059 ; 28.084,44.104 29.684,42.504 29.735,42.504 29.735,41.869 ; 92.434,55.445 92.434,55.775 93.704,57.045 99.19,57.045 100.206,58.061 100.206,62.455 99.444,63.217 98.174,63.217 ; 94.567,53.489 94.567,56.486 ; 97.384,27.392 98.524,27.448 ; 98.646,27.326 100.574,27.326 ; 99.272,53.586 103.326,53.49
  Bottom Layer w2: 1.866,34.209 1.866,36.059 ; 5.1,74.575 5.1,74.773 6.556,76.229 ; 15.175,69.45 15.175,71.225 15.2,71.25 ; 18.375,68.05 18.375,70.4 ; 20.447,59.119 20.447,60.119 ; 21.885,2.167 25.354,2.167 ; 24.806,8.724 27.174,8.724 ; 24.997,56.761 25.04,55.02
  Bottom Layer w2.2: 10.725,52.84 16.515,52.84 ; 10.975,50.315 16.765,50.315 ; 11.075,47.84 16.865,47.84 ; 11.125,45.29 16.915,45.29 ; 11.2,42.715 16.99,42.715
  Bottom Layer w2.5: 57.864,76.503 59.24,76.503
  Bottom Layer w2.7: 64.247,76.438 64.247,83.063

## Other copper
Bottom Layer:
  rectangle: 68.4,48.875 70.7,51.25
  region: 30.491,14.399 26.377,14.399 26.377,10.933 30.491,10.933
  region: 39.528,73.014 35.455,73.014 35.455,69.026 39.528,69.026
  region: 47.389,74.753 45.525,74.753 45.525,69.422 47.389,69.422
  region: 47.867,79.744 45.391,79.744 45.391,76.899 47.867,76.899
  rectangle: 55.521,45.681 58.566,49.004
  region: 56.84,15.335 54.156,15.335 54.156,12.132 56.84,12.132
  region: 56.717,7.441 53.606,7.441 53.606,2.992 56.717,2.992
  region: 68.107,15.705 60.53,15.705 60.53,12.98 68.107,12.98
  region: 25.107,15.129 22.15,15.129 22.15,12.229 25.107,12.229
  rectangle: 93.834,50.004 99.424,51.804
  rectangle: 55.666,75.274 57.656,76.281
  rectangle: 79.207,54.595 82.891,57.163
  rectangle: 54.732,55.247 57.657,58.046
  rectangle: 59.981,49.856 64.147,51.997
  rectangle: 77.071,41.363 81.28,45.507
  region: 50.275,4.684 47.9,4.684 47.9,2.2 50.275,2.2
  rectangle: 37.731,73.996 44.475,75.716
  rectangle: 77.943,33.97 80.015,38.594
  rectangle: 97.744,52.604 102.349,55.206
  rectangle: 97.252,21.071 100.212,25.604
  rectangle: 94.559,50.619 95.345,55.901
  rectangle: 92.36,21.738 94.424,24.06
  rectangle: 85.446,46.246 87.54,50.139
  rectangle: 62.159,36.986 63.799,41.915
  region: 46.4,7.712 44.382,7.712 44.382,5.525 46.4,5.525
  region: 46.545,15.229 43.644,15.229 43.644,12.742 46.545,12.742
  rectangle: 35.967,50.835 38.486,55.215
  rectangle: 33.624,59.844 35.072,63.159
  region: 19.8,18.93 16.907,18.93 16.907,17.05 19.8,17.05
  rectangle: 99.034,47.353 101.529,49.329
  rectangle: 98.264,50.004 101.529,51.754
  rectangle: 96.682,26.405 101.265,27.156
  rectangle: 91.107,22.278 92.36,24.023
  rectangle: 91.635,24.686 94.51,26.615
  rectangle: 84.461,15.645 87.698,18.585
  region: 73.725,53.025 71.535,53.025 71.535,50.502 73.725,50.502
  region: 62.821,25.671 59.892,25.671 59.892,23.698 62.821,23.698
  rectangle: 48.557,55.386 50.566,58.862
  rectangle: 51.226,49.561 53.357,53.325
  rectangle: 41.355,71.257 44.426,73.272
  rectangle: 32.215,76.842 36.432,78.804
  rectangle: 33.59,63.46 34.436,65.98
  rectangle: 15.552,25.7 20.475,27.608
  rectangle: 17.078,28.529 19.9,30.2
  region: 19.8,22 16.65,22 16.65,19.46 19.8,19.46
  region: 20.099,16.425 16.975,16.425 16.975,14.545 20.099,14.545
  region: 20.125,14.029 16.975,14.029 16.975,12.175 20.125,12.175
  rectangle: 0.833,33.4 2.675,35.409
  region: 62.09,4.732 58.498,4.732 58.498,3.068 62.09,3.068
  rectangle: 35.374,62.121 36.696,62.841
  rectangle: 50.623,71.284 52.159,72.531
  rectangle: 34.754,60.907 35.549,61.912
  rectangle: 33.863,65.059 34.235,66.376
  rectangle: 26.692,12.335 27.74,12.817
  region: 19.426,77.65 15.797,77.65 15.797,74.734 19.426,74.734
  region: 51.339,58.964 48.795,58.964 48.795,55.579 51.339,55.579
  rectangle: 96.398,29.104 102.689,29.995
  region: 102.033,40.793 98.696,40.793 98.696,31.723 102.033,31.723
  region: 64.254,8.653 60.629,8.653 60.629,5.401 64.254,5.401
  region: 21.342,51.113 19.075,51.113 19.075,46.475 21.342,46.475
  region: 32.905,10.045 30.423,10.045 30.423,7.948 32.905,7.948
  region: 101.624,34.097 98.751,34.097 98.751,29.77 101.624,29.77
  region: 60.551,79.781 53.517,79.781 53.517,75.029 60.551,75.029
  rectangle: 89.773,56.431 93.482,57.754
  rectangle: 38.482,32.204 40.732,34.929
  rectangle: 49.957,49.479 52.857,51.479
  rectangle: 56.532,51.779 59.857,54.129
  rectangle: 56.682,34.104 59.287,36.029
  rectangle: 59.757,31.104 61.832,33.554
  rectangle: 50.632,45.179 52.957,46.954
  rectangle: 59.707,43.054 61.482,45.779
  rectangle: 77.257,66.929 79.607,71.404
  rectangle: 74.65,0.725 77.8,2.4
  rectangle: 29.857,44.554 31.557,46.754
  rectangle: 94.775,15.3 98.625,19.35
  rectangle: 16.95,30.9 20.15,32.725
  rectangle: 68.275,5.475 70.75,7.85
  text "SP" at 55.912,80.276 h1.3
  text "M.KHOSH" at 103.55,79.2 h2 r90
  text "B1159" at 95.15,7.7 h1.3
  text "1402/06" at 94.75,5.05 h1
  text "VER.6" at 1.85,3.325 h2
  text "B1159  1402/04/25" at -1.155,-0.065 h3 r90

## Silkscreen, mask and mechanical layers (free items; w line width, h text height)
Top Overlay:
  drawing of 297 lines, arcs and shapes, not listed
  text "SP" at 54.305,77.236 h1.3
  text "MIC" at 48.23,69.277 h1 r270
  text "4" at 19.1,52.325 h1.52
  text "3" at 19.275,49.8 h1.52
  text "2" at 19.1,47.25 h1.52
  text "1" at 18.75,44.725 h1.52
  text "D" at 19,41.85 h1.52
  text "BAHERELECTRONIC" at 63.238,19.082 h2.3
  text "TR" at 83.798,16.532 h1.3
  text "-" at 69.925,3.338 h1.5
  text "-" at 63.037,2.99 h1.3
  text "+" at 46.551,2.954 h1.3
  text "V" at 56.653,2.926 h1.3

## Text inside footprints (layer, text, board x,y; h text height)
1U50V: Top Overlay "+" at 34.145,46.318 h2 r180
10U50V: Top Overlay "+" at 13.975,66.725 h2
12V1A: Top Overlay "C" at 56.506,11.135 h1.3; Top Overlay "NO" at 47.241,11.235 h1.3; Top Overlay "NC" at 51.991,11.155 h1.3
47U35V: Top Overlay "+" at 29.851,58.718 h2
47U35V: Top Overlay "+" at 59.668,40.18 h2 r90
47U50V: Top Overlay "+" at 88.423,61.46 h2 r270
47U50V: Top Overlay "+" at 87.454,29.529 h2 r270
47U50V: Top Overlay "+" at 49.817,50.344 h2
47U50V: Top Overlay "+" at 33.668,70.181 h2
100U25V: Top Overlay "+" at 69.066,45.183 h2 r270
220U16V: Top Overlay "+" at 36.884,48.369 h2